# Altium PCB Panel.PcbDoc (part 2 of 2)
Units mil, origin at the board's own origin, x right, y up, seen from the top; angles counter-clockwise.
Board outline 2975 x 8550 mil, 2 copper layers (Top Layer, Bottom Layer); 208 components, 76 nets, 352 pads, 184 vias.
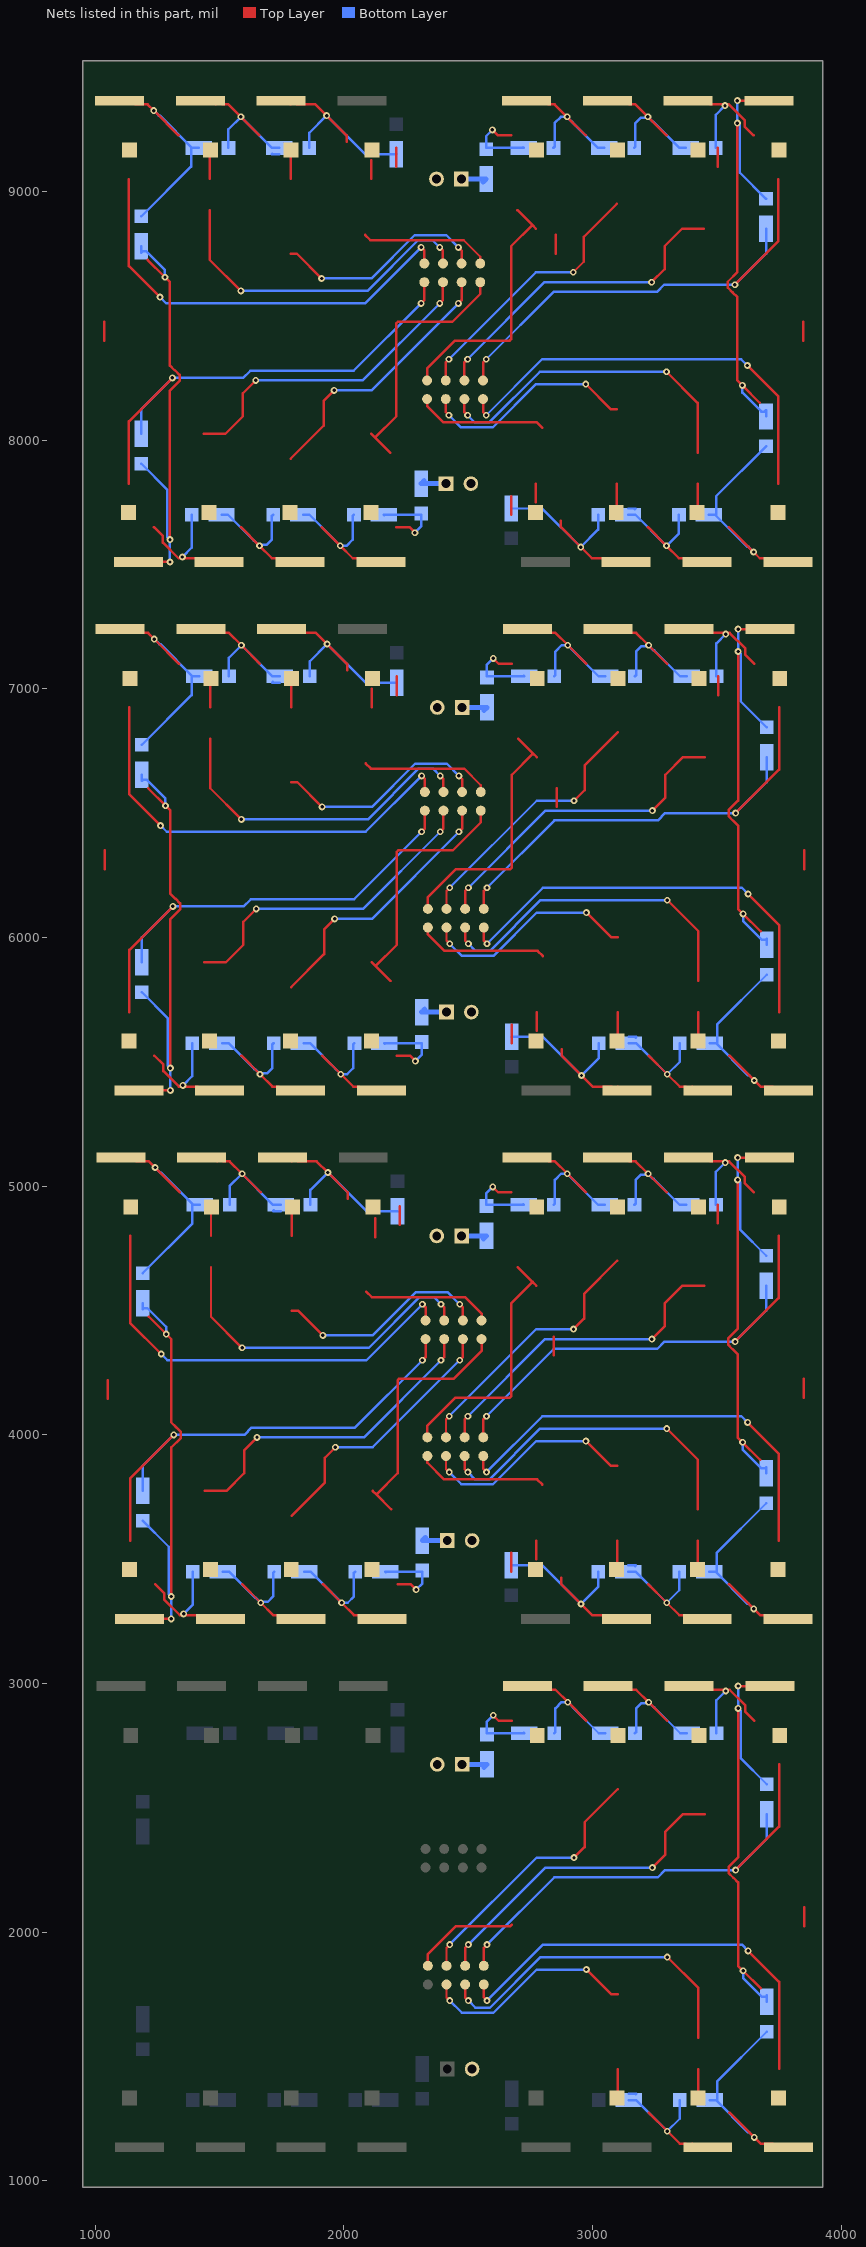
[diagram p2: the nets of this part, all layers, seen from the top]

## Via types
v1: diameter 27.56, hole 13.78, Top Layer to Bottom Layer, 184 vias

## Nets (pads, with @x,y where several pads share a name; then routed paths per layer and width w, separated by ;. In a path a pad name is that pad's centre, name@x,y a point inside that pad or via, vN(x,y) a via of type N, cw(c..) or ccw(c..) an arc to the next point about the centre after c; other vN are vias at no path point) (continued)
NetPA2_D2_NEG: PA2_D2.NEG PA2_D3.POS PA2_S2.POS PA2_S3.NEG PA2_TP2.PAD | length 1639.5
  Top Layer w10: PA2_TP2.PAD@2412.2,1789.96 2412.2,1737.8 v1(2425,1725) ; v1(2975,1850) 3075,1750 3100,1750 ; PA2_S2.POS@3100,1312.2 3100,1450 ; 3225,1275 v1(3300,1200) 3350,1150 PA2_S3.NEG@3375,1150 ; PA2_S3.NEG@3400.28,1149.72 PA2_S3.NEG@3425,1125
  Bottom Layer w10: v1(2425,1725) 2473.78,1676.22 2601.22,1676.22 2775,1850 v1(2975,1850) ; PA2_D2.NEG@3145.07,1325 3175,1325 v1(3300,1200) 3350,1250 PA2_D3.POS@3350,1325 ; PA2_D2.NEG@3145.07,1350 3175.27,1350 PA2_D2.NEG@3172.83,1347.56
NetPA2_D3_NEG: PA2_D3.NEG PA2_D4.POS PA2_S3.POS PA2_S4.NEG PA2_TP3.PAD | length 2319.3
  Top Layer w10: PA2_TP3.PAD@2487.2,1789.96 2487.2,1737.8 v1(2500,1725) ; v1(3300,1900) 3425,1775 3425,1575 ; PA2_S3.POS@3425,1312.2 3425,1450 ; 3550,1275 v1(3650,1175) 3675,1150 PA2_S4.NEG@3725,1150 ; PA2_S4.NEG@3735,1135 PA2_S4.NEG@3740,1130
  Bottom Layer w10: v1(2500,1725) 2528.78,1696.22 2586.92,1696.22 2790.7,1900 v1(3300,1900) ; PA2_D3.NEG@3470.07,1325 3495.66,1325 3625.31,1195.35 3629.65,1195.35 v1(3650,1175) v1@3645.66,1175 ; PA2_D3.NEG@3500,1325 3500,1400 PA2_D4.POS@3700,1600
NetPA2_D4_NEG: PA2_D4.NEG PA2_D5.POS PA2_S4.POS PA2_S5.NEG PA2_TP4.PAD | length 3789.4
  Top Layer w10: PA2_TP4.PAD@2567.94,1784.22 PA2_TP4.PAD@2562.2,1789.96 2562.2,1737.8 v1(2575,1725) ; v1(3585,2900) 3585,2300.7 3546.22,2261.92 3546.22,2238.08 3565.26,2219.04 3565.96,2219.04 3585,2200 3585,1865 v1(3605,1845) 3675,1775 ; v1(3585,2990) PA2_S5.NEG@3645,2990 ; v1(3625,1925) 3750,1800 3750,1450 ; 3850,2025 3850,2100 3850,2025
  Bottom Layer w10: v1(2575,1725) 2800,1950 3600,1950 v1(3625,1925) ; v1(3585,2990) v1(3585,2900) 3595,2890 3595,2700.07 PA2_D5.POS@3700,2595.07 ; v1(3605,1845) 3605,1816.22 3681.22,1740 3694.34,1740 3700,1745.66 PA2_D4.NEG@3700,1720.07
NetPA2_D5_NEG: PA2_D5.NEG PA2_D6.POS PA2_S5.POS PA2_S6.NEG PA2_TP5.PAD | length 2416.1
  Top Layer w10: PA2_TP5.PAD@2562.2,1864.96 2562.2,1937.2 v1(2575,1950) ; PA2_S6.NEG@3475,2975 3550.7,2975 3613.78,2911.92 3613.78,2886.22 3650,2850 ; v1(3575,2250) 3750,2425 3750,2675
  Bottom Layer w10: v1(2575,1950) 2846.22,2221.22 3261.92,2221.22 3290.7,2250 v1(3575,2250) 3700,2375 PA2_D5.NEG@3700,2475 ; PA2_D6.POS@3497.83,2800 3497.83,2932.83 v1(3535,2970)
NetPA2_D6_NEG: PA2_D6.NEG PA2_D7.POS PA2_S6.POS PA2_S7.NEG PA2_TP6.PAD | length 1880.5
  Top Layer w10: PA2_TP6.PAD@2487.2,1864.96 2487.2,1937.2 v1(2500,1950) ; PA2_S7.NEG@3150,2975 3175,2975 v1(3225,2925) 3300,2850 ; v1(3240,2260) 3292.2,2312.2 3292.2,2404.41 3362.8,2475 3450,2475
  Bottom Layer w10: v1(2500,1950) 2810,2260 v1(3240,2260) ; PA2_D7.POS@3170.07,2800 3175,2804.93 3175,2900 3196.64,2921.64 3221.64,2921.64 v1(3225,2925) 3245.35,2904.65 3247.52,2904.65 3352.17,2800 PA2_D6.NEG@3377.76,2800
NetPA2_D7_NEG: PA2_D7.NEG PA2_D8.POS PA2_S7.POS PA2_S8.NEG PA2_TP7.PAD | length 2146.6
  Top Layer w10: PA2_TP7.PAD@2412.2,1864.96 2412.2,1937.2 v1(2425,1950) ; PA2_S8.NEG@2825,2975 2850,2975 v1(2900,2925) 2975,2850 ; 2967.2,2342.2 v1(2925,2300) 2967.2,2342.2 ; 2967.2,2342.2 2967.2,2442.2 ; 2967.2,2342.2 2967.2,2442.2 ; 2967.2,2442.2 3100,2575 2967.2,2442.2
  Bottom Layer w10: v1(2425,1950) 2775,2300 ; PA2_D8.POS@2845.07,2800 2850,2804.93 2850,2900 2875,2925 v1(2900,2925) 2920.35,2904.65 2920.35,2904.06 3024.41,2800 PA2_D7.NEG@3050,2800 ; 2775,2300 v1(2925,2300) 2775,2300
NetPA2_D8_NEG: PA2_D8.NEG PA2_D9.POS PA2_S8.POS PA2_TP8.PAD | length 756.8
  Top Layer w10: PA2_TP8.PAD@2337.2,1864.96 2337.2,1912.2 2450,2025 2669.14,2025 2675,2030.86 ; v1@2600,2875 v1(2600,2872.24) 2622.24,2850 2675,2850
  Bottom Layer w10: v1(2600,2872.24) 2575,2847.24 2575,2800 PA2_D8.NEG@2725,2800 PA2_D8.NEG@2722.83,2802.17
NetPA2_D9_NEG: PA2_D9.NEG PA2_P1.1 | length 117.7
  Bottom Layer w20: PA2_P1.1@2475,2675 PA2_D9.NEG@2575,2675 PA2_D9.NEG@2562.5,2662.5
NetPA3_D1_NEG: PA3_D1.NEG PA3_D2.POS PA3_S1.POS PA3_S2.NEG PA3_TP1.PAD | length 1526.6
  Top Layer w10: PA3_S2.NEG@1765.22,5125 PA3_S2.NEG@1789.95,5100.27 ; PA3_S2.NEG@1790.22,5125 1815.22,5100 1890.22,5100 v1(1935.22,5055) 2015.22,4975 2015.22,4950 ; 2090.22,4575 2111.45,4553.78 2486.45,4553.78 2553.03,4487.2 PA3_TP1.PAD@2553.03,4460.04 ; 2125,4795.07 2125,4870.07 ; 2224.78,4845.07 2224.78,4920.07
  Bottom Layer w10: PA3_D2.POS@1865.22,4925 1865.22,4985 v1(1935.22,5055) 2090.22,4900 PA3_D1.NEG@2215.22,4900
NetPA3_D2_NEG: PA3_D2.NEG PA3_D3.POS PA3_S2.POS PA3_S3.NEG PA3_TP2.PAD | length 1639.5
  Top Layer w10: PA3_S3.NEG@1465.22,5125 PA3_S3.NEG@1489.95,5100.27 ; PA3_S3.NEG@1515.22,5100 1540.22,5100 v1(1590.22,5050) 1665.22,4975 ; 1790.22,4500 1815.22,4500 v1(1915.22,4400) ; 1790.22,4800 PA3_S2.POS@1790.22,4937.8 ; v1(2465.22,4525) 2478.03,4512.2 PA3_TP2.PAD@2478.03,4460.04
  Bottom Layer w10: PA3_D3.POS@1540.22,4925 1540.22,5000 v1(1590.22,5050) 1715.22,4925 PA3_D2.NEG@1745.15,4925 ; PA3_D2.NEG@1717.39,4902.44 1714.95,4900 PA3_D2.NEG@1745.15,4900 ; v1(1915.22,4400) 2115.22,4400 2289,4573.78 2416.45,4573.78 v1(2465.22,4525)
NetPA3_D3_NEG: PA3_D3.NEG PA3_D4.POS PA3_S3.POS PA3_S4.NEG PA3_TP3.PAD | length 2319.3
  Top Layer w10: PA3_S4.NEG@1150.22,5120 PA3_S4.NEG@1155.22,5115 ; PA3_S4.NEG@1165.22,5100 1215.22,5100 v1(1240.22,5075) 1340.22,4975 ; 1465.22,4675 1465.22,4475 v1(1590.22,4350) ; 1465.22,4800 PA3_S3.POS@1465.22,4937.8 ; v1(2390.22,4525) 2403.03,4512.2 PA3_TP3.PAD@2403.03,4460.04
  Bottom Layer w10: PA3_D4.POS@1190.22,4650 1390.22,4850 PA3_D3.NEG@1390.22,4925 ; v1@1244.57,5075 v1(1240.22,5075) 1260.58,5054.65 1264.92,5054.65 1394.57,4925 PA3_D3.NEG@1420.15,4925 ; v1(1590.22,4350) 2099.52,4350 2303.3,4553.78 2361.45,4553.78 v1(2390.22,4525)
NetPA3_D4_NEG: PA3_D5.NEG PA3_D6.POS PA3_S5.POS PA3_S6.NEG PA3_TP5.PAD | length 2416.1
  Top Layer w10: 1140.22,3575 1140.22,3825 v1(1315.22,4000) ; 1240.22,3400 1276.45,3363.78 1276.45,3338.08 1339.52,3275 PA3_S6.NEG@1415.22,3275 ; v1(2315.22,4300) 2328.03,4312.8 PA3_TP5.PAD@2328.03,4385.04
  Bottom Layer w10: PA3_D5.NEG@1190.22,3775 1190.22,3875 v1(1315.22,4000) 1599.52,4000 1628.3,4028.78 2044,4028.78 v1(2315.22,4300) ; v1(1355.22,3280) 1392.39,3317.17 PA3_D6.POS@1392.39,3450
NetPA3_D5_NEG: PA3_D6.NEG PA3_D7.POS PA3_S6.POS PA3_S7.NEG PA3_TP6.PAD | length 1880.5
  Top Layer w10: 1440.22,3775 1527.43,3775 1598.02,3845.59 1598.02,3937.8 v1(1650.22,3990) ; 1590.22,3400 v1(1665.22,3325) 1715.22,3275 PA3_S7.NEG@1740.22,3275 ; v1(2390.22,4300) 2403.03,4312.8 PA3_TP6.PAD@2403.03,4385.04
  Bottom Layer w10: PA3_D6.NEG@1512.46,3450 1538.06,3450 1642.7,3345.35 1644.87,3345.35 v1(1665.22,3325) 1668.58,3328.36 1693.58,3328.36 1715.22,3350 1715.22,3445.07 PA3_D7.POS@1720.15,3450 ; v1(1650.22,3990) 2080.22,3990 v1(2390.22,4300)
NetPA3_D6_NEG: PA3_D7.NEG PA3_D8.POS PA3_S7.POS PA3_S8.NEG PA3_TP7.PAD | length 1649.1
  Top Layer w10: 1790.22,3675 1923.02,3807.8 1923.02,3907.8 v1(1965.22,3950) ; 1915.22,3400 v1(1990.22,3325) 2040.22,3275 PA3_S8.NEG@2065.22,3275 ; v1(2465.22,4300) 2478.03,4312.8 PA3_TP7.PAD@2478.03,4385.04
  Bottom Layer w10: PA3_D7.NEG@1840.22,3450 1865.82,3450 1969.87,3345.94 1969.87,3345.35 v1(1990.22,3325) 2015.22,3325 2040.22,3350 2040.22,3445.07 PA3_D8.POS@2045.15,3450 ; v1(1965.22,3950) 2115.22,3950 v1(2465.22,4300)
NetPA3_D7_NEG: PA3_D8.NEG PA3_D9.POS PA3_S8.POS PA3_TP8.PAD | length 1357.1
  Top Layer w10: 2115.22,3775 2129.93,3760.3 ; 2190.22,3700 2129.93,3760.3 ; 2215.22,3400 2267.99,3400 v1(2290.22,3377.76) v1@2290.22,3375 ; PA3_TP8.PAD@2553.03,4385.04 2553.03,4337.8 2440.22,4225 2221.08,4225 2215.22,4219.14 2215.22,3845.59 2129.93,3760.3
  Bottom Layer w10: PA3_D8.NEG@2167.39,3447.83 PA3_D8.NEG@2165.22,3450 2315.22,3450 2315.22,3402.76 v1(2290.22,3377.76)
NetPA3_D8_NEG: 
NetPA3_D9_NEG: PA3_D9.NEG PA3_P1.1 | length 117.7
  Bottom Layer w20: PA3_D9.NEG@2327.72,3587.5 PA3_D9.NEG@2315.22,3575 PA3_P1.1@2415.22,3575
NetPA4_D1_NEG: PA4_D1.NEG PA4_D2.POS PA4_S1.POS PA4_S2.NEG PA4_TP1.PAD | length 1601.6
  Top Layer w10: PA4_TP1.PAD@2335.2,3914.96 2335.2,3887.8 2401.78,3821.22 2776.78,3821.22 2798,3800 ; 2673.22,3450 2673.22,3525 ; 2873,3425 2873,3400 v1(2953,3320) 2998,3275 3073,3275 PA4_S2.NEG@3098,3250 ; PA4_S2.NEG@3098.28,3274.72 PA4_S2.NEG@3123,3250 ; 2773,3500 2773,3575 2773,3500
  Bottom Layer w10: PA4_D1.NEG@2673,3475 2798,3475 v1(2953,3320) 3023,3390 PA4_D2.POS@3023,3450
NetPA4_D2_NEG: PA4_D2.NEG PA4_D3.POS PA4_S2.POS PA4_S3.NEG PA4_TP2.PAD | length 1639.5
  Top Layer w10: PA4_TP2.PAD@2410.2,3914.96 2410.2,3862.8 v1(2423,3850) ; v1(2973,3975) 3073,3875 3098,3875 ; PA4_S2.POS@3098,3437.2 3098,3575 ; 3223,3400 v1(3298,3325) 3348,3275 PA4_S3.NEG@3373,3275 ; PA4_S3.NEG@3398.28,3274.72 PA4_S3.NEG@3423,3250
  Bottom Layer w10: v1(2423,3850) 2471.78,3801.22 2599.22,3801.22 2773,3975 v1(2973,3975) ; PA4_D2.NEG@3143.07,3450 3173,3450 v1(3298,3325) 3348,3375 PA4_D3.POS@3348,3450 ; PA4_D2.NEG@3143.07,3475 3173.27,3475 PA4_D2.NEG@3170.83,3472.56
NetPA4_D3_NEG: PA4_D3.NEG PA4_D4.POS PA4_S3.POS PA4_S4.NEG PA4_TP3.PAD | length 2319.3
  Top Layer w10: PA4_TP3.PAD@2485.2,3914.96 2485.2,3862.8 v1(2498,3850) ; v1(3298,4025) 3423,3900 3423,3700 ; PA4_S3.POS@3423,3437.2 3423,3575 ; 3548,3400 v1(3648,3300) 3673,3275 PA4_S4.NEG@3723,3275 ; PA4_S4.NEG@3733,3260 PA4_S4.NEG@3738,3255
  Bottom Layer w10: v1(2498,3850) 2526.78,3821.22 2584.92,3821.22 2788.7,4025 v1(3298,4025) ; PA4_D3.NEG@3468.07,3450 3493.66,3450 3623.31,3320.35 3627.65,3320.35 v1(3648,3300) v1@3643.66,3300 ; PA4_D3.NEG@3498,3450 3498,3525 PA4_D4.POS@3698,3725
NetPA4_D4_NEG: PA4_D4.NEG PA4_D5.POS PA4_S4.POS PA4_S5.NEG PA4_TP4.PAD | length 3789.4
  Top Layer w10: PA4_TP4.PAD@2565.94,3909.22 PA4_TP4.PAD@2560.2,3914.96 2560.2,3862.8 v1(2573,3850) ; v1(3583,5025) 3583,4425.7 3544.22,4386.92 3544.22,4363.08 3563.26,4344.04 3563.96,4344.04 3583,4325 3583,3990 v1(3603,3970) 3673,3900 ; v1(3583,5115) PA4_S5.NEG@3643,5115 ; v1(3623,4050) 3748,3925 3748,3575 ; 3848,4150 3848,4225 3848,4150
  Bottom Layer w10: v1(2573,3850) 2798,4075 3598,4075 v1(3623,4050) ; v1(3583,5115) v1(3583,5025) 3593,5015 3593,4825.07 PA4_D5.POS@3698,4720.07 ; v1(3603,3970) 3603,3941.22 3679.22,3865 3692.34,3865 3698,3870.66 PA4_D4.NEG@3698,3845.07
NetPA4_D5_NEG: PA4_D5.NEG PA4_D6.POS PA4_S5.POS PA4_S6.NEG PA4_TP5.PAD | length 2416.1
  Top Layer w10: PA4_TP5.PAD@2560.2,3989.96 2560.2,4062.2 v1(2573,4075) ; PA4_S6.NEG@3473,5100 3548.7,5100 3611.78,5036.92 3611.78,5011.22 3648,4975 ; v1(3573,4375) 3748,4550 3748,4800
  Bottom Layer w10: v1(2573,4075) 2844.22,4346.22 3259.92,4346.22 3288.7,4375 v1(3573,4375) 3698,4500 PA4_D5.NEG@3698,4600 ; PA4_D6.POS@3495.83,4925 3495.83,5057.83 v1(3533,5095)
NetPA4_D6_NEG: PA4_D7.NEG PA4_D8.POS PA4_S7.POS PA4_S8.NEG PA4_TP7.PAD | length 2146.6
  Top Layer w10: PA4_TP7.PAD@2410.2,3989.96 2410.2,4062.2 v1(2423,4075) ; PA4_S8.NEG@2823,5100 2848,5100 v1(2898,5050) 2973,4975 ; 2965.2,4467.2 2965.2,4567.2 ; 2965.2,4467.2 2965.2,4567.2 ; 2965.2,4467.2 v1(2923,4425) 2965.2,4467.2 ; 2965.2,4567.2 3098,4700 2965.2,4567.2
  Bottom Layer w10: v1(2423,4075) 2773,4425 ; PA4_D8.POS@2843.07,4925 2848,4929.93 2848,5025 2873,5050 v1(2898,5050) 2918.35,5029.65 2918.35,5029.06 3022.41,4925 PA4_D7.NEG@3048,4925 ; 2773,4425 v1(2923,4425) 2773,4425
NetPA4_D7_NEG: PA4_D8.NEG PA4_D9.POS PA4_S8.POS PA4_TP8.PAD | length 1432.1
  Top Layer w10: PA4_TP8.PAD@2335.2,3989.96 2335.2,4037.2 2448,4150 2667.14,4150 2673,4155.86 2673,4529.41 2758.3,4614.7 ; v1@2598,5000 v1(2598,4997.24) 2620.24,4975 2673,4975 ; 2698,4675 2758.3,4614.7 ; 2773,4600 2758.3,4614.7 ; 2843,4320 2843,4395
  Bottom Layer w10: v1(2598,4997.24) 2573,4972.24 2573,4925 PA4_D8.NEG@2723,4925 PA4_D8.NEG@2720.83,4927.17
NetPA4_D8_NEG: 
NetPA4_D9_NEG: PA4_D9.NEG PA4_P1.1 | length 117.7
  Bottom Layer w20: PA4_P1.1@2473,4800 PA4_D9.NEG@2573,4800 PA4_D9.NEG@2560.5,4787.5
NetPA5_D1_NEG: PA5_D1.NEG PA5_D2.POS PA5_S1.POS PA5_S2.NEG PA5_TP1.PAD | length 1526.6
  Top Layer w10: PA5_S2.NEG@1762.22,7250 PA5_S2.NEG@1786.95,7225.27 ; PA5_S2.NEG@1787.22,7250 1812.22,7225 1887.22,7225 v1(1932.22,7180) 2012.22,7100 2012.22,7075 ; 2087.22,6700 2108.45,6678.78 2483.45,6678.78 2550.03,6612.2 PA5_TP1.PAD@2550.03,6585.04 ; 2112.22,6925 2112.22,7000 ; 2212,6975 2212,7050
  Bottom Layer w10: PA5_D2.POS@1862.22,7050 1862.22,7110 v1(1932.22,7180) 2087.22,7025 PA5_D1.NEG@2212.22,7025
NetPA5_D2_NEG: PA5_D2.NEG PA5_D3.POS PA5_S2.POS PA5_S3.NEG PA5_TP2.PAD | length 1639.5
  Top Layer w10: PA5_S3.NEG@1462.22,7250 PA5_S3.NEG@1486.95,7225.27 ; PA5_S3.NEG@1512.22,7225 1537.22,7225 v1(1587.22,7175) 1662.22,7100 ; 1787.22,6625 1812.22,6625 v1(1912.22,6525) ; 1787.22,6925 PA5_S2.POS@1787.22,7062.8 ; v1(2462.22,6650) 2475.03,6637.2 PA5_TP2.PAD@2475.03,6585.04
  Bottom Layer w10: PA5_D3.POS@1537.22,7050 1537.22,7125 v1(1587.22,7175) 1712.22,7050 PA5_D2.NEG@1742.15,7050 ; PA5_D2.NEG@1714.39,7027.44 1711.95,7025 PA5_D2.NEG@1742.15,7025 ; v1(1912.22,6525) 2112.22,6525 2286,6698.78 2413.45,6698.78 v1(2462.22,6650)
NetPA5_D3_NEG: PA5_D3.NEG PA5_D4.POS PA5_S3.POS PA5_S4.NEG PA5_TP3.PAD | length 2319.3
  Top Layer w10: PA5_S4.NEG@1147.22,7245 PA5_S4.NEG@1152.22,7240 ; PA5_S4.NEG@1162.22,7225 1212.22,7225 v1(1237.22,7200) 1337.22,7100 ; 1462.22,6800 1462.22,6600 v1(1587.22,6475) ; 1462.22,6925 PA5_S3.POS@1462.22,7062.8 ; v1(2387.22,6650) 2400.03,6637.2 PA5_TP3.PAD@2400.03,6585.04
  Bottom Layer w10: PA5_D4.POS@1187.22,6775 1387.22,6975 PA5_D3.NEG@1387.22,7050 ; v1@1241.57,7200 v1(1237.22,7200) 1257.58,7179.65 1261.92,7179.65 1391.57,7050 PA5_D3.NEG@1417.15,7050 ; v1(1587.22,6475) 2096.52,6475 2300.3,6678.78 2358.45,6678.78 v1(2387.22,6650)
NetPA5_D4_NEG: PA5_D4.NEG PA5_D5.POS PA5_S4.POS PA5_S5.NEG PA5_TP4.PAD | length 3714.4
  Top Layer w10: 1037.22,6275 1037.22,6350 ; 1137.22,6925 1137.22,6575 v1(1262.22,6450) ; 1212.22,6600 v1(1282.22,6530) 1302.22,6510 1302.22,6175 1321.26,6155.96 1321.97,6155.96 1341,6136.92 1341,6113.08 1302.22,6074.3 v1(1302.22,5475) ; PA5_S5.NEG@1242.22,5385 v1(1302.22,5385) ; v1(2312.22,6650) 2325.03,6637.2 PA5_TP4.PAD@2325.03,6585.04 PA5_TP4.PAD@2319.28,6590.78
  Bottom Layer w10: PA5_D5.POS@1187.22,5779.93 1292.22,5674.93 1292.22,5485 v1(1302.22,5475) v1(1302.22,5385) ; PA5_D4.NEG@1187.22,6654.93 1187.22,6629.34 1192.88,6635 1206,6635 1282.22,6558.78 v1(1282.22,6530) ; v1(1262.22,6450) 1287.22,6425 2087.22,6425 v1(2312.22,6650)
NetPA5_D5_NEG: PA5_D5.NEG PA5_D6.POS PA5_S5.POS PA5_S6.NEG PA5_TP5.PAD | length 2416.1
  Top Layer w10: 1137.22,5700 1137.22,5950 v1(1312.22,6125) ; 1237.22,5525 1273.45,5488.78 1273.45,5463.08 1336.52,5400 PA5_S6.NEG@1412.22,5400 ; v1(2312.22,6425) 2325.03,6437.8 PA5_TP5.PAD@2325.03,6510.04
  Bottom Layer w10: PA5_D5.NEG@1187.22,5900 1187.22,6000 v1(1312.22,6125) 1596.52,6125 1625.3,6153.78 2041,6153.78 v1(2312.22,6425) ; v1(1352.22,5405) 1389.39,5442.17 PA5_D6.POS@1389.39,5575
NetPA5_D6_NEG: PA5_D6.NEG PA5_D7.POS PA5_S6.POS PA5_S7.NEG PA5_TP6.PAD | length 1880.5
  Top Layer w10: 1437.22,5900 1524.43,5900 1595.02,5970.59 1595.02,6062.8 v1(1647.22,6115) ; 1587.22,5525 v1(1662.22,5450) 1712.22,5400 PA5_S7.NEG@1737.22,5400 ; v1(2387.22,6425) 2400.03,6437.8 PA5_TP6.PAD@2400.03,6510.04
  Bottom Layer w10: PA5_D6.NEG@1509.46,5575 1535.06,5575 1639.7,5470.35 1641.87,5470.35 v1(1662.22,5450) 1665.58,5453.36 1690.58,5453.36 1712.22,5475 1712.22,5570.07 PA5_D7.POS@1717.15,5575 ; v1(1647.22,6115) 2077.22,6115 v1(2387.22,6425)
NetPA5_D7_NEG: PA5_D7.NEG PA5_D8.POS PA5_S7.POS PA5_S8.NEG PA5_TP7.PAD | length 1649.1
  Top Layer w10: 1787.22,5800 1920.02,5932.8 1920.02,6032.8 v1(1962.22,6075) ; 1912.22,5525 v1(1987.22,5450) 2037.22,5400 PA5_S8.NEG@2062.22,5400 ; v1(2462.22,6425) 2475.03,6437.8 PA5_TP7.PAD@2475.03,6510.04
  Bottom Layer w10: PA5_D7.NEG@1837.22,5575 1862.82,5575 1966.87,5470.94 1966.87,5470.35 v1(1987.22,5450) 2012.22,5450 2037.22,5475 2037.22,5570.07 PA5_D8.POS@2042.15,5575 ; v1(1962.22,6075) 2112.22,6075 v1(2462.22,6425)
NetPA5_D8_NEG: PA5_D8.NEG PA5_D9.POS PA5_S8.POS PA5_TP8.PAD | length 1357.1
  Top Layer w10: 2112.22,5900 2126.93,5885.3 ; 2187.22,5825 2126.93,5885.3 ; 2212.22,5525 2264.99,5525 v1(2287.22,5502.76) v1@2287.22,5500 ; PA5_TP8.PAD@2550.03,6510.04 2550.03,6462.8 2437.22,6350 2218.08,6350 2212.22,6344.14 2212.22,5970.59 2126.93,5885.3
  Bottom Layer w10: PA5_D8.NEG@2164.39,5572.83 PA5_D8.NEG@2162.22,5575 2312.22,5575 2312.22,5527.76 v1(2287.22,5502.76)
NetPA5_D9_NEG: PA5_D9.NEG PA5_P1.1 | length 117.7
  Bottom Layer w20: PA5_D9.NEG@2324.72,5712.5 PA5_D9.NEG@2312.22,5700 PA5_P1.1@2412.22,5700
NetPA6_D1_NEG: PA6_D1.NEG PA6_D2.POS PA6_S1.POS PA6_S2.NEG PA6_TP1.PAD | length 1601.6
  Top Layer w10: PA6_TP1.PAD@2337.2,6039.96 2337.2,6012.8 2403.78,5946.22 2778.78,5946.22 2800,5925 ; 2675.22,5575 2675.22,5650 ; 2875,5550 2875,5525 v1(2955,5445) 3000,5400 3075,5400 PA6_S2.NEG@3100,5375 ; PA6_S2.NEG@3100.28,5399.73 PA6_S2.NEG@3125,5375 ; 2775,5625 2775,5700 2775,5625
  Bottom Layer w10: PA6_D1.NEG@2675,5600 2800,5600 v1(2955,5445) 3025,5515 PA6_D2.POS@3025,5575
NetPA6_D2_NEG: PA6_D2.NEG PA6_D3.POS PA6_S2.POS PA6_S3.NEG PA6_TP2.PAD | length 1639.5
  Top Layer w10: PA6_TP2.PAD@2412.2,6039.96 2412.2,5987.8 v1(2425,5975) ; v1(2975,6100) 3075,6000 3100,6000 ; PA6_S2.POS@3100,5562.2 3100,5700 ; 3225,5525 v1(3300,5450) 3350,5400 PA6_S3.NEG@3375,5400 ; PA6_S3.NEG@3400.28,5399.73 PA6_S3.NEG@3425,5375
  Bottom Layer w10: v1(2425,5975) 2473.78,5926.22 2601.22,5926.22 2775,6100 v1(2975,6100) ; PA6_D2.NEG@3145.07,5575 3175,5575 v1(3300,5450) 3350,5500 PA6_D3.POS@3350,5575 ; PA6_D2.NEG@3145.07,5600 3175.27,5600 PA6_D2.NEG@3172.83,5597.56
NetPA6_D3_NEG: PA6_D3.NEG PA6_D4.POS PA6_S3.POS PA6_S4.NEG PA6_TP3.PAD | length 2319.3
  Top Layer w10: PA6_TP3.PAD@2487.2,6039.96 2487.2,5987.8 v1(2500,5975) ; v1(3300,6150) 3425,6025 3425,5825 ; PA6_S3.POS@3425,5562.2 3425,5700 ; 3550,5525 v1(3650,5425) 3675,5400 PA6_S4.NEG@3725,5400 ; PA6_S4.NEG@3735,5385 PA6_S4.NEG@3740,5380
  Bottom Layer w10: v1(2500,5975) 2528.78,5946.22 2586.92,5946.22 2790.7,6150 v1(3300,6150) ; PA6_D3.NEG@3470.07,5575 3495.66,5575 3625.31,5445.35 3629.65,5445.35 v1(3650,5425) v1@3645.66,5425 ; PA6_D3.NEG@3500,5575 3500,5650 PA6_D4.POS@3700,5850
NetPA6_D4_NEG: PA6_D4.NEG PA6_D5.POS PA6_S4.POS PA6_S5.NEG PA6_TP4.PAD | length 3789.4
  Top Layer w10: PA6_TP4.PAD@2567.94,6034.22 PA6_TP4.PAD@2562.2,6039.96 2562.2,5987.8 v1(2575,5975) ; v1(3585,7150) 3585,6550.7 3546.22,6511.92 3546.22,6488.08 3565.26,6469.04 3565.96,6469.04 3585,6450 3585,6115 v1(3605,6095) 3675,6025 ; v1(3585,7240) PA6_S5.NEG@3645,7240 ; v1(3625,6175) 3750,6050 3750,5700 ; 3850,6275 3850,6350 3850,6275
  Bottom Layer w10: v1(2575,5975) 2800,6200 3600,6200 v1(3625,6175) ; v1(3585,7240) v1(3585,7150) 3595,7140 3595,6950.07 PA6_D5.POS@3700,6845.07 ; v1(3605,6095) 3605,6066.22 3681.22,5990 3694.34,5990 3700,5995.66 PA6_D4.NEG@3700,5970.07
NetPA6_D5_NEG: PA6_D5.NEG PA6_D6.POS PA6_S5.POS PA6_S6.NEG PA6_TP5.PAD | length 2416.1
  Top Layer w10: PA6_TP5.PAD@2562.2,6114.96 2562.2,6187.2 v1(2575,6200) ; PA6_S6.NEG@3475,7225 3550.7,7225 3613.78,7161.92 3613.78,7136.22 3650,7100 ; v1(3575,6500) 3750,6675 3750,6925
  Bottom Layer w10: v1(2575,6200) 2846.22,6471.22 3261.92,6471.22 3290.7,6500 v1(3575,6500) 3700,6625 PA6_D5.NEG@3700,6725 ; PA6_D6.POS@3497.83,7050 3497.83,7182.83 v1(3535,7220)
NetPA6_D6_NEG: PA6_D6.NEG PA6_D7.POS PA6_S6.POS PA6_S7.NEG PA6_TP6.PAD | length 1955.5
  Top Layer w10: PA6_TP6.PAD@2487.2,6114.96 2487.2,6187.2 v1(2500,6200) ; PA6_S7.NEG@3150,7225 3175,7225 v1(3225,7175) 3300,7100 ; v1(3240,6510) 3292.2,6562.2 3292.2,6654.41 3362.8,6725 3450,6725 ; 3505,6975 3505,7050
  Bottom Layer w10: v1(2500,6200) 2810,6510 v1(3240,6510) ; PA6_D7.POS@3170.07,7050 3175,7054.93 3175,7150 3196.64,7171.64 3221.64,7171.64 v1(3225,7175) 3245.35,7154.65 3247.52,7154.65 3352.17,7050 PA6_D6.NEG@3377.76,7050
NetPA6_D7_NEG: PA6_D7.NEG PA6_D8.POS PA6_S7.POS PA6_S8.NEG PA6_TP7.PAD | length 2146.6
  Top Layer w10: PA6_TP7.PAD@2412.2,6114.96 2412.2,6187.2 v1(2425,6200) ; PA6_S8.NEG@2825,7225 2850,7225 v1(2900,7175) 2975,7100 ; 2967.2,6592.2 2967.2,6692.2 ; 2967.2,6592.2 2967.2,6692.2 ; 2967.2,6592.2 v1(2925,6550) 2967.2,6592.2 ; 2967.2,6692.2 3100,6825 2967.2,6692.2
  Bottom Layer w10: v1(2425,6200) 2775,6550 ; PA6_D8.POS@2845.07,7050 2850,7054.93 2850,7150 2875,7175 v1(2900,7175) 2920.35,7154.65 2920.35,7154.06 3024.41,7050 PA6_D7.NEG@3050,7050 ; 2775,6550 v1(2925,6550) 2775,6550
NetPA6_D8_NEG: PA6_D8.NEG PA6_D9.POS PA6_S8.POS PA6_TP8.PAD | length 1432.1
  Top Layer w10: PA6_TP8.PAD@2337.2,6114.96 2337.2,6162.2 2450,6275 2669.14,6275 2675,6280.86 2675,6654.41 2760.3,6739.7 ; v1@2600,7125 v1(2600,7122.24) 2622.24,7100 2675,7100 ; 2700,6800 2760.3,6739.7 ; 2775,6725 2760.3,6739.7 ; 2855,6525 2855,6600
  Bottom Layer w10: v1(2600,7122.24) 2575,7097.24 2575,7050 PA6_D8.NEG@2725,7050 PA6_D8.NEG@2722.83,7052.17
NetPA6_D9_NEG: PA6_D9.NEG PA6_P1.1 | length 117.7
  Bottom Layer w20: PA6_P1.1@2475,6925 PA6_D9.NEG@2575,6925 PA6_D9.NEG@2562.5,6912.5
NetPA7_D1_NEG: PA7_D1.NEG PA7_D2.POS PA7_S1.POS PA7_S2.NEG PA7_TP1.PAD | length 1526.6
  Top Layer w10: PA7_S2.NEG@1760.22,9375 PA7_S2.NEG@1784.95,9350.27 ; PA7_S2.NEG@1785.22,9375 1810.22,9350 1885.22,9350 v1(1930.22,9305) 2010.22,9225 2010.22,9200 ; 2085.22,8825 2106.45,8803.78 2481.45,8803.78 2548.03,8737.2 PA7_TP1.PAD@2548.03,8710.04 ; 2110.22,9050 2110.22,9125 ; 2210,9100 2210,9175
  Bottom Layer w10: PA7_D2.POS@1860.22,9175 1860.22,9235 v1(1930.22,9305) 2085.22,9150 PA7_D1.NEG@2210.22,9150
NetPA7_D2_NEG: PA7_D2.NEG PA7_D3.POS PA7_S2.POS PA7_S3.NEG PA7_TP2.PAD | length 1639.5
  Top Layer w10: PA7_S3.NEG@1460.22,9375 PA7_S3.NEG@1484.95,9350.27 ; PA7_S3.NEG@1510.22,9350 1535.22,9350 v1(1585.22,9300) 1660.22,9225 ; 1785.22,8750 1810.22,8750 v1(1910.22,8650) ; 1785.22,9050 PA7_S2.POS@1785.22,9187.8 ; v1(2460.22,8775) 2473.03,8762.2 PA7_TP2.PAD@2473.03,8710.04
  Bottom Layer w10: PA7_D3.POS@1535.22,9175 1535.22,9250 v1(1585.22,9300) 1710.22,9175 PA7_D2.NEG@1740.15,9175 ; PA7_D2.NEG@1712.39,9152.44 1709.95,9150 PA7_D2.NEG@1740.15,9150 ; v1(1910.22,8650) 2110.22,8650 2284,8823.78 2411.45,8823.78 v1(2460.22,8775)
NetPA7_D3_NEG: PA7_D3.NEG PA7_D4.POS PA7_S3.POS PA7_S4.NEG PA7_TP3.PAD | length 2319.3
  Top Layer w10: PA7_S4.NEG@1145.22,9370 PA7_S4.NEG@1150.22,9365 ; PA7_S4.NEG@1160.22,9350 1210.22,9350 v1(1235.22,9325) 1335.22,9225 ; 1460.22,8925 1460.22,8725 v1(1585.22,8600) ; 1460.22,9050 PA7_S3.POS@1460.22,9187.8 ; v1(2385.22,8775) 2398.03,8762.2 PA7_TP3.PAD@2398.03,8710.04
  Bottom Layer w10: PA7_D4.POS@1185.22,8900 1385.22,9100 PA7_D3.NEG@1385.22,9175 ; v1@1239.57,9325 v1(1235.22,9325) 1255.58,9304.65 1259.92,9304.65 1389.57,9175 PA7_D3.NEG@1415.15,9175 ; v1(1585.22,8600) 2094.52,8600 2298.3,8803.78 2356.45,8803.78 v1(2385.22,8775)
NetPA7_D4_NEG: PA7_D4.NEG PA7_D5.POS PA7_S4.POS PA7_S5.NEG PA7_TP4.PAD | length 3714.4
  Top Layer w10: 1035.22,8400 1035.22,8475 ; 1135.22,9050 1135.22,8700 v1(1260.22,8575) ; 1210.22,8725 v1(1280.22,8655) 1300.22,8635 1300.22,8300 1319.26,8280.96 1319.97,8280.96 1339,8261.92 1339,8238.08 1300.22,8199.3 v1(1300.22,7600) ; PA7_S5.NEG@1240.22,7510 v1(1300.22,7510) ; v1(2310.22,8775) 2323.03,8762.2 PA7_TP4.PAD@2323.03,8710.04 PA7_TP4.PAD@2317.28,8715.78
  Bottom Layer w10: PA7_D5.POS@1185.22,7904.93 1290.22,7799.93 1290.22,7610 v1(1300.22,7600) v1(1300.22,7510) ; PA7_D4.NEG@1185.22,8779.93 1185.22,8754.34 1190.88,8760 1204,8760 1280.22,8683.78 v1(1280.22,8655) ; v1(1260.22,8575) 1285.22,8550 2085.22,8550 v1(2310.22,8775)
NetPA7_D5_NEG: PA7_D5.NEG PA7_D6.POS PA7_S5.POS PA7_S6.NEG PA7_TP5.PAD | length 2416.1
  Top Layer w10: 1135.22,7825 1135.22,8075 v1(1310.22,8250) ; 1235.22,7650 1271.45,7613.78 1271.45,7588.08 1334.52,7525 PA7_S6.NEG@1410.22,7525 ; v1(2310.22,8550) 2323.03,8562.8 PA7_TP5.PAD@2323.03,8635.04
  Bottom Layer w10: PA7_D5.NEG@1185.22,8025 1185.22,8125 v1(1310.22,8250) 1594.52,8250 1623.3,8278.78 2039,8278.78 v1(2310.22,8550) ; v1(1350.22,7530) 1387.39,7567.17 PA7_D6.POS@1387.39,7700
NetPA7_D6_NEG: PA7_D6.NEG PA7_D7.POS PA7_S6.POS PA7_S7.NEG PA7_TP6.PAD | length 1880.5
  Top Layer w10: 1435.22,8025 1522.43,8025 1593.02,8095.59 1593.02,8187.8 v1(1645.22,8240) ; 1585.22,7650 v1(1660.22,7575) 1710.22,7525 PA7_S7.NEG@1735.22,7525 ; v1(2385.22,8550) 2398.03,8562.8 PA7_TP6.PAD@2398.03,8635.04
  Bottom Layer w10: PA7_D6.NEG@1507.46,7700 1533.06,7700 1637.7,7595.35 1639.87,7595.35 v1(1660.22,7575) 1663.58,7578.36 1688.58,7578.36 1710.22,7600 1710.22,7695.07 PA7_D7.POS@1715.15,7700 ; v1(1645.22,8240) 2075.22,8240 v1(2385.22,8550)
NetPA7_D7_NEG: PA7_D7.NEG PA7_D8.POS PA7_S7.POS PA7_S8.NEG PA7_TP7.PAD | length 1649.1
  Top Layer w10: 1785.22,7925 1918.02,8057.8 1918.02,8157.8 v1(1960.22,8200) ; 1910.22,7650 v1(1985.22,7575) 2035.22,7525 PA7_S8.NEG@2060.22,7525 ; v1(2460.22,8550) 2473.03,8562.8 PA7_TP7.PAD@2473.03,8635.04
  Bottom Layer w10: PA7_D7.NEG@1835.22,7700 1860.82,7700 1964.87,7595.94 1964.87,7595.35 v1(1985.22,7575) 2010.22,7575 2035.22,7600 2035.22,7695.07 PA7_D8.POS@2040.15,7700 ; v1(1960.22,8200) 2110.22,8200 v1(2460.22,8550)
NetPA7_D8_NEG: PA7_D8.NEG PA7_D9.POS PA7_S8.POS PA7_TP8.PAD | length 1357.1
  Top Layer w10: 2110.22,8025 2124.93,8010.3 ; 2185.22,7950 2124.93,8010.3 ; 2210.22,7650 2262.99,7650 v1(2285.22,7627.76) v1@2285.22,7625 ; PA7_TP8.PAD@2548.03,8635.04 2548.03,8587.8 2435.22,8475 2216.08,8475 2210.22,8469.14 2210.22,8095.59 2124.93,8010.3
  Bottom Layer w10: PA7_D8.NEG@2162.39,7697.83 PA7_D8.NEG@2160.22,7700 2310.22,7700 2310.22,7652.76 v1(2285.22,7627.76)
NetPA7_D9_NEG: PA7_D9.NEG PA7_P1.1 | length 117.7
  Bottom Layer w20: PA7_D9.NEG@2322.72,7837.5 PA7_D9.NEG@2310.22,7825 PA7_P1.1@2410.22,7825
NetPA8_D1_NEG: PA8_D1.NEG PA8_D2.POS PA8_S1.POS PA8_S2.NEG PA8_TP1.PAD | length 1601.6
  Top Layer w10: PA8_TP1.PAD@2334.2,8164.96 2334.2,8137.8 2400.78,8071.22 2775.78,8071.22 2797,8050 ; 2672.22,7700 2672.22,7775 ; 2872,7675 2872,7650 v1(2952,7570) 2997,7525 3072,7525 PA8_S2.NEG@3097,7500 ; PA8_S2.NEG@3097.28,7524.73 PA8_S2.NEG@3122,7500 ; 2772,7750 2772,7825 2772,7750
  Bottom Layer w10: PA8_D1.NEG@2672,7725 2797,7725 v1(2952,7570) 3022,7640 PA8_D2.POS@3022,7700
NetPA8_D2_NEG: PA8_D2.NEG PA8_D3.POS PA8_S2.POS PA8_S3.NEG PA8_TP2.PAD | length 1639.5
  Top Layer w10: PA8_TP2.PAD@2409.2,8164.96 2409.2,8112.8 v1(2422,8100) ; v1(2972,8225) 3072,8125 3097,8125 ; PA8_S2.POS@3097,7687.2 3097,7825 ; 3222,7650 v1(3297,7575) 3347,7525 PA8_S3.NEG@3372,7525 ; PA8_S3.NEG@3397.28,7524.73 PA8_S3.NEG@3422,7500
  Bottom Layer w10: v1(2422,8100) 2470.78,8051.22 2598.22,8051.22 2772,8225 v1(2972,8225) ; PA8_D2.NEG@3142.07,7700 3172,7700 v1(3297,7575) 3347,7625 PA8_D3.POS@3347,7700 ; PA8_D2.NEG@3142.07,7725 3172.27,7725 PA8_D2.NEG@3169.83,7722.56
NetPA8_D3_NEG: PA8_D3.NEG PA8_D4.POS PA8_S3.POS PA8_S4.NEG PA8_TP3.PAD | length 2319.3
  Top Layer w10: PA8_TP3.PAD@2484.2,8164.96 2484.2,8112.8 v1(2497,8100) ; v1(3297,8275) 3422,8150 3422,7950 ; PA8_S3.POS@3422,7687.2 3422,7825 ; 3547,7650 v1(3647,7550) 3672,7525 PA8_S4.NEG@3722,7525 ; PA8_S4.NEG@3732,7510 PA8_S4.NEG@3737,7505
  Bottom Layer w10: v1(2497,8100) 2525.78,8071.22 2583.92,8071.22 2787.7,8275 v1(3297,8275) ; PA8_D3.NEG@3467.07,7700 3492.66,7700 3622.31,7570.35 3626.65,7570.35 v1(3647,7550) v1@3642.66,7550 ; PA8_D3.NEG@3497,7700 3497,7775 PA8_D4.POS@3697,7975
NetPA8_D4_NEG: PA8_D4.NEG PA8_D5.POS PA8_S4.POS PA8_S5.NEG PA8_TP4.PAD | length 3789.4
  Top Layer w10: PA8_TP4.PAD@2564.94,8159.22 PA8_TP4.PAD@2559.2,8164.96 2559.2,8112.8 v1(2572,8100) ; v1(3582,9275) 3582,8675.7 3543.22,8636.92 3543.22,8613.08 3562.26,8594.04 3562.96,8594.04 3582,8575 3582,8240 v1(3602,8220) 3672,8150 ; v1(3582,9365) PA8_S5.NEG@3642,9365 ; v1(3622,8300) 3747,8175 3747,7825 ; 3847,8400 3847,8475 3847,8400
  Bottom Layer w10: v1(2572,8100) 2797,8325 3597,8325 v1(3622,8300) ; v1(3582,9365) v1(3582,9275) 3592,9265 3592,9075.07 PA8_D5.POS@3697,8970.07 ; v1(3602,8220) 3602,8191.22 3678.22,8115 3691.34,8115 3697,8120.66 PA8_D4.NEG@3697,8095.07
NetPA8_D5_NEG: PA8_D5.NEG PA8_D6.POS PA8_S5.POS PA8_S6.NEG PA8_TP5.PAD | length 2416.1
  Top Layer w10: PA8_TP5.PAD@2559.2,8239.96 2559.2,8312.2 v1(2572,8325) ; PA8_S6.NEG@3472,9350 3547.7,9350 3610.78,9286.92 3610.78,9261.22 3647,9225 ; v1(3572,8625) 3747,8800 3747,9050
  Bottom Layer w10: v1(2572,8325) 2843.22,8596.22 3258.92,8596.22 3287.7,8625 v1(3572,8625) 3697,8750 PA8_D5.NEG@3697,8850 ; PA8_D6.POS@3494.83,9175 3494.83,9307.83 v1(3532,9345)
NetPA8_D6_NEG: PA8_D6.NEG PA8_D7.POS PA8_S6.POS PA8_S7.NEG PA8_TP6.PAD | length 1955.5
  Top Layer w10: PA8_TP6.PAD@2484.2,8239.96 2484.2,8312.2 v1(2497,8325) ; PA8_S7.NEG@3147,9350 3172,9350 v1(3222,9300) 3297,9225 ; v1(3237,8635) 3289.2,8687.2 3289.2,8779.41 3359.8,8850 3447,8850 ; 3502,9100 3502,9175
  Bottom Layer w10: v1(2497,8325) 2807,8635 v1(3237,8635) ; PA8_D7.POS@3167.07,9175 3172,9179.93 3172,9275 3193.64,9296.64 3218.64,9296.64 v1(3222,9300) 3242.35,9279.65 3244.52,9279.65 3349.17,9175 PA8_D6.NEG@3374.76,9175
NetPA8_D7_NEG: PA8_D7.NEG PA8_D8.POS PA8_S7.POS PA8_S8.NEG PA8_TP7.PAD | length 2146.6
  Top Layer w10: PA8_TP7.PAD@2409.2,8239.96 2409.2,8312.2 v1(2422,8325) ; PA8_S8.NEG@2822,9350 2847,9350 v1(2897,9300) 2972,9225 ; 2964.2,8717.2 v1(2922,8675) 2964.2,8717.2 ; 2964.2,8717.2 2964.2,8817.2 ; 2964.2,8717.2 2964.2,8817.2 ; 2964.2,8817.2 3097,8950 2964.2,8817.2
  Bottom Layer w10: v1(2422,8325) 2772,8675 ; PA8_D8.POS@2842.07,9175 2847,9179.93 2847,9275 2872,9300 v1(2897,9300) 2917.35,9279.65 2917.35,9279.06 3021.41,9175 PA8_D7.NEG@3047,9175 ; 2772,8675 v1(2922,8675) 2772,8675
NetPA8_D8_NEG: PA8_D8.NEG PA8_D9.POS PA8_S8.POS PA8_TP8.PAD | length 1432.1
  Top Layer w10: PA8_TP8.PAD@2334.2,8239.96 2334.2,8287.2 2447,8400 2666.14,8400 2672,8405.86 2672,8779.41 2757.3,8864.7 ; v1@2597,9250 v1(2597,9247.24) 2619.24,9225 2672,9225 ; 2697,8925 2757.3,8864.7 ; 2772,8850 2757.3,8864.7 ; 2852,8750 2852,8825
  Bottom Layer w10: v1(2597,9247.24) 2572,9222.24 2572,9175 PA8_D8.NEG@2722,9175 PA8_D8.NEG@2719.83,9177.17
NetPA8_D9_NEG: PA8_D9.NEG PA8_P1.1 | length 117.7
  Bottom Layer w20: PA8_P1.1@2472,9050 PA8_D9.NEG@2572,9050 PA8_D9.NEG@2559.5,9037.5
NewNet1: PA4_D6.NEG PA4_D7.POS PA4_S6.POS PA4_S7.NEG PA4_TP6.PAD | length 1955.5
  Top Layer w10: PA4_TP6.PAD@2485.2,3989.96 2485.2,4062.2 v1(2498,4075) ; PA4_S7.NEG@3148,5100 3173,5100 v1(3223,5050) 3298,4975 ; v1(3238,4385) 3290.2,4437.2 3290.2,4529.41 3360.8,4600 3448,4600 ; 3503,4850 3503,4925
  Bottom Layer w10: v1(2498,4075) 2808,4385 v1(3238,4385) ; PA4_D7.POS@3168.07,4925 3173,4929.93 3173,5025 3194.64,5046.64 3219.64,5046.64 v1(3223,5050) 3243.35,5029.65 3245.52,5029.65 3350.17,4925 PA4_D6.NEG@3375.76,4925
NewNet2: PA3_D4.NEG PA3_D5.POS PA3_S4.POS PA3_S5.NEG PA3_TP4.PAD | length 3714.4
  Top Layer w10: 1050,4145.07 1050,4220.07 ; 1140.22,4800 1140.22,4450 v1(1265.22,4325) ; 1215.22,4475 v1(1285.22,4405) 1305.22,4385 1305.22,4050 1324.26,4030.96 1324.97,4030.96 1344,4011.92 1344,3988.08 1305.22,3949.3 v1(1305.22,3350) ; PA3_S5.NEG@1245.22,3260 v1(1305.22,3260) ; v1(2315.22,4525) 2328.03,4512.2 PA3_TP4.PAD@2328.03,4460.04 PA3_TP4.PAD@2322.28,4465.78
  Bottom Layer w10: PA3_D5.POS@1190.22,3654.93 1295.22,3549.93 1295.22,3360 v1(1305.22,3350) v1(1305.22,3260) ; PA3_D4.NEG@1190.22,4529.93 1190.22,4504.34 1195.88,4510 1209,4510 1285.22,4433.78 v1(1285.22,4405) ; v1(1265.22,4325) 1290.22,4300 2090.22,4300 v1(2315.22,4525)
VOUT: PA1_P1.2 PA2_P1.2 PA3_P1.2 PA4_P1.2 PA5_P1.2 PA6_P1.2 PA7_P1.2 PA8_P1.2

## Polygon pours and split planes (outlines as drawn)
VOUT on Top Layer "Top Layer-VOUT" (solid, pour order 0): 2275,9375 2600,9375 2600,1175 2300,1175
GND on Top Layer "Top Layer-GND 1" (solid, pour order 4): 975,9500 3900,9500 3900,1000 975,1000